# EAGLE board Gain+HPF (EAGLE 7.6.0)
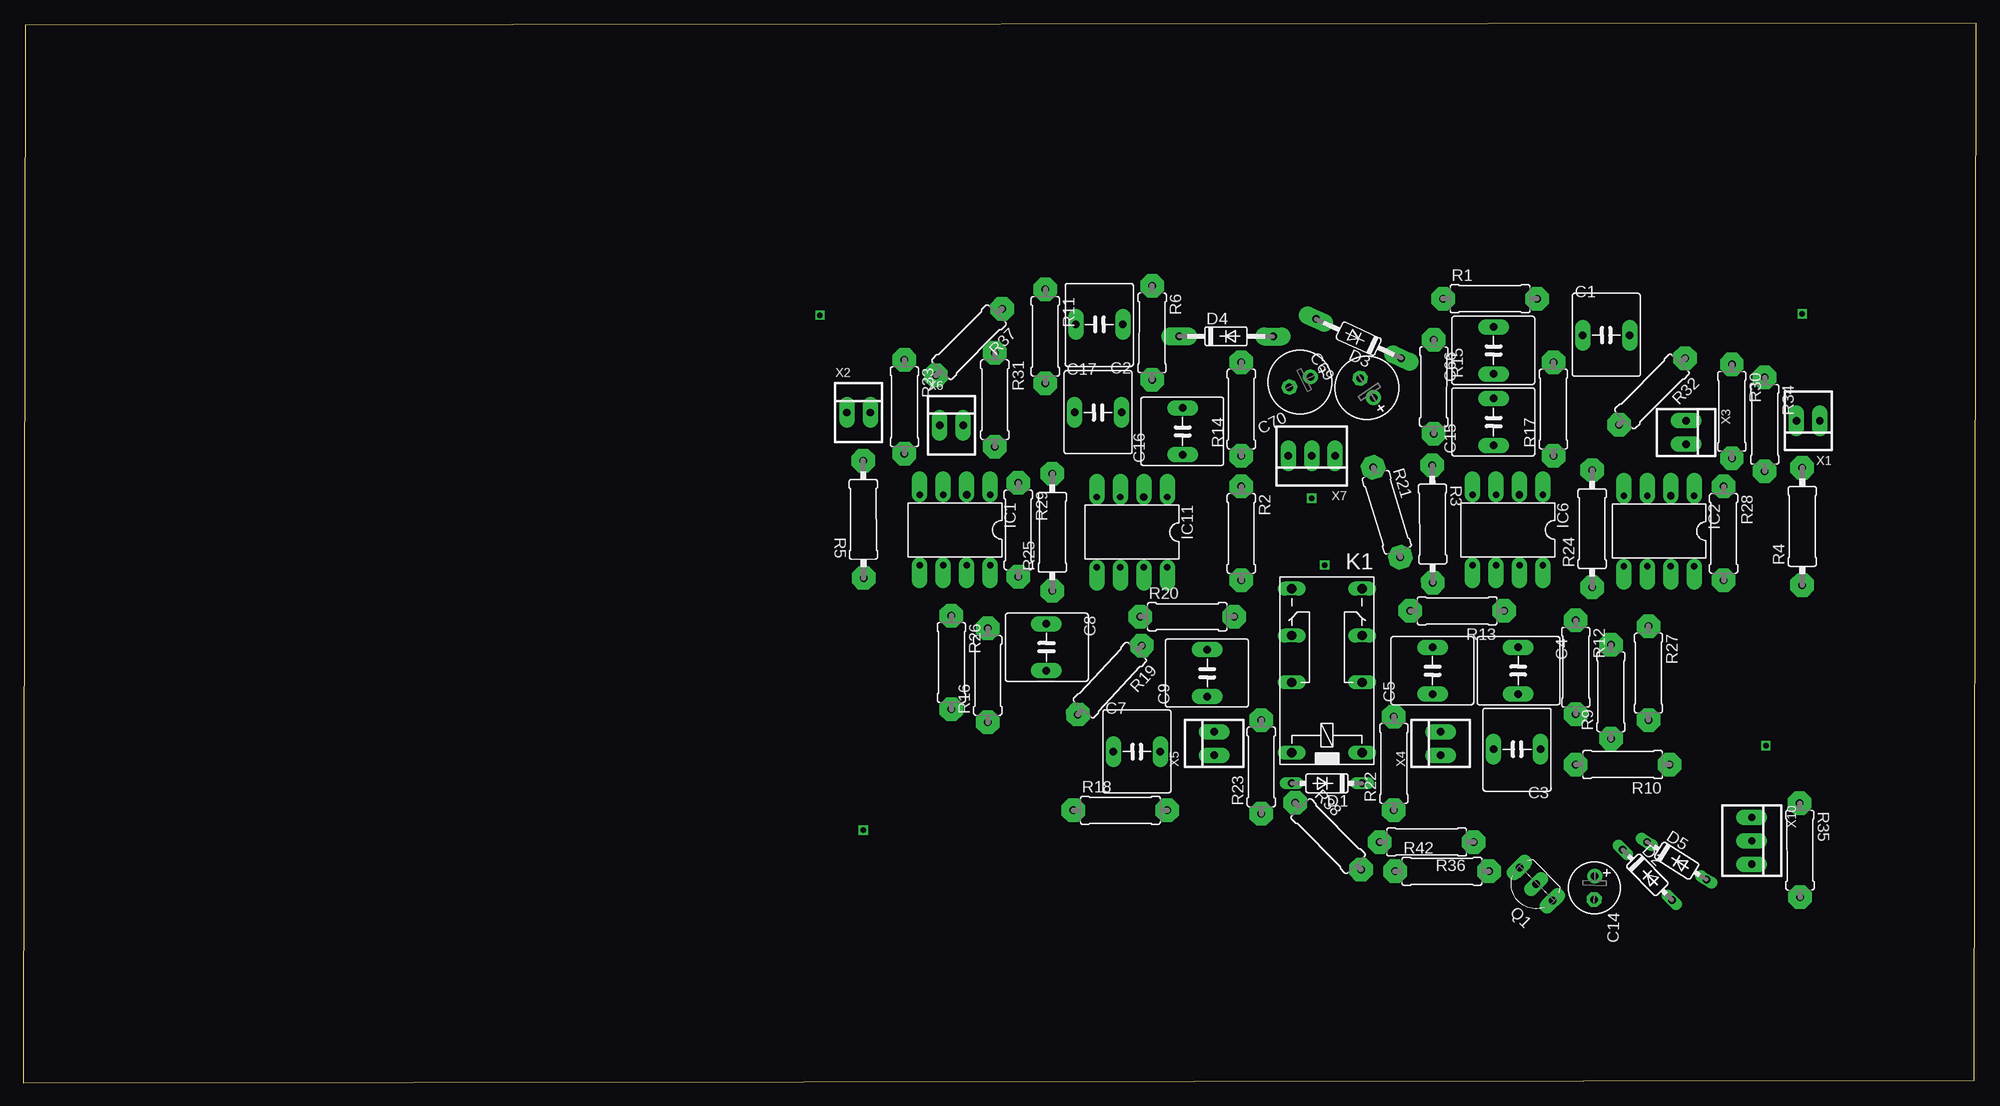
[diagram p0: board, top side]
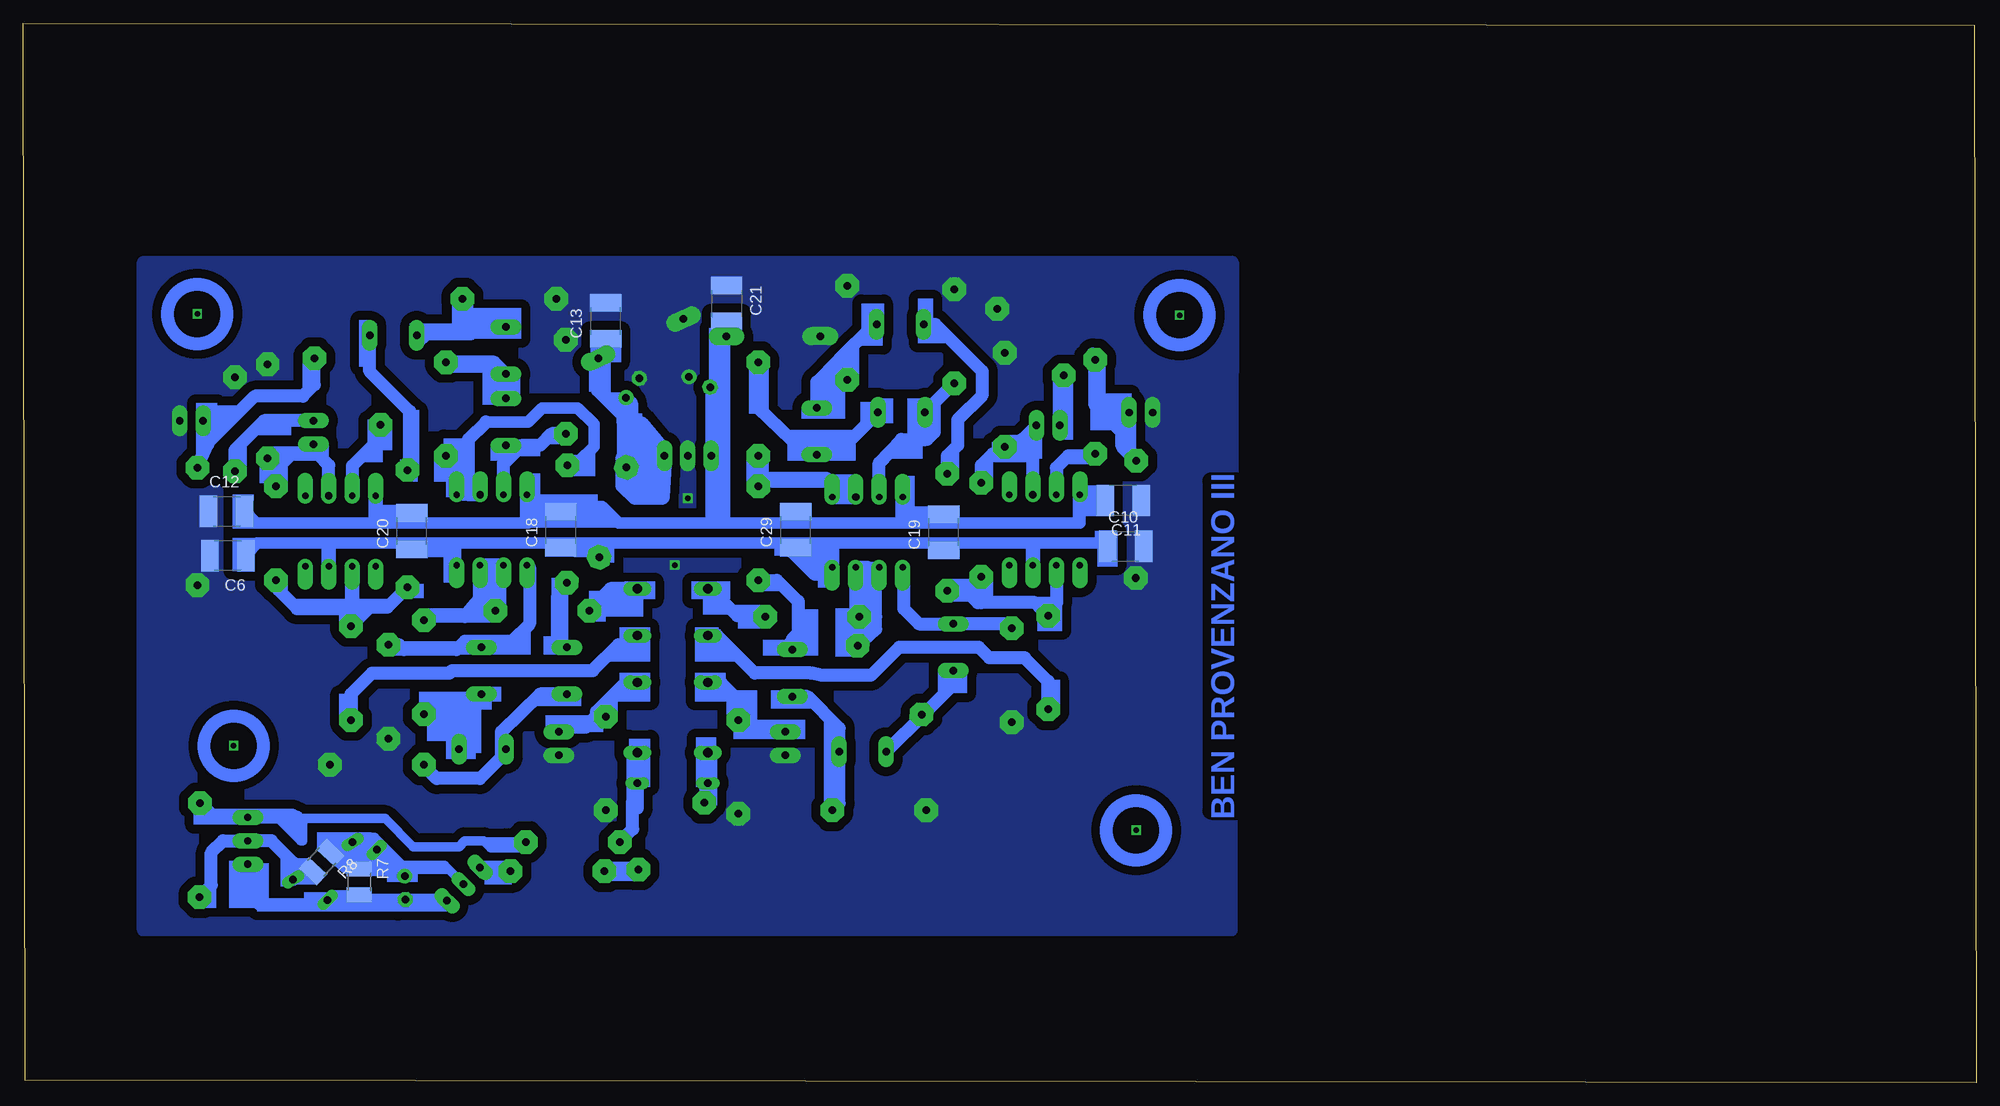
[diagram p1: board, bottom side, seen from below]

Size 211.38 x 114.67 mm. Coordinates in mm from the lower left corner, seen from the top.
Outline: 0,0 211.12,0.25 211.38,114.67 0.25,114.42 0,0
Copper layers (1*16): Top 0.035mm / dielectric 1.5mm / Bottom 0.035mm
Design rules "default": minimum track width 10mil, minimum drill 24mil, track to track 8mil, track to pad 8mil, pad to pad 8mil, via to via 8mil, smd to smd 8mil, copper to edge 40mil, drill to drill 8mil, minimum pad ring 10mil, minimum via ring 8mil, stop-mask expansion 5mil, vias tented up to drill 0mil, thermal gap 10mil

## Footprints (pad centres in the part's own frame; a part is rotated, then mirrored left to right if it is on the bottom)
C050-075X075 = drill 0.813 pad 1.676 long: 1 -2.54,0; 2 2.54,0
C4532 = smd 1.9 x 3.4: 1 -1.95,0; 2 1.95,0
E2,5-6 = drill 0.813 pad 1.6: + -1.27,0 | drill 0.813 pad 1.6 octagon: - 1.27,0
E2,5-7 = drill 0.813 pad 1.6: + -1.27,0 | drill 0.813 pad 1.6 octagon: - 1.27,0
DO35-7 = drill 0.813 long: A 3.81,0; C -3.81,0
DO35-10 = drill 0.813 pad 1.93 long: A 5.08,0; C -5.08,0
DIL08 = drill 0.7 pad 1.676 offset: 1 -3.81,-3.81; 3 1.27,-3.81; 4 3.81,-3.81; 5 3.81,3.81; 6 1.27,3.81; 7 -1.27,3.81; 8 -3.81,3.81 | drill 0.8 pad 1.676 offset: 2 -1.27,-3.81
351 = drill 1.016 long: 1 -3.81,-3.81; 16 -3.81,3.81; O1 8.89,-3.81; O2 8.89,3.81; P1 3.81,-3.81; P2 3.81,3.81; S1 13.97,-3.81; S2 13.97,3.81
TO92-EBC = drill 0.813 pad 1.524 long: B 0,-1.27 | drill 0.813 pad 1.6 long: C -2.54,-1.27; E 2.54,-1.27
0309/10 = drill 0.813 pad 2.54 octagon: 1 -5.08,0; 2 5.08,0
0309/12 = drill 0.813 pad 2.54 octagon: 1 -6.35,0; 2 6.35,0
R1210 = smd 1.6 x 2.7: 1 -1.4,0; 2 1.4,0
22-23-2021 = drill 0.8 pad 1.676 long: 1 -1.27,0; 2 1.27,0
22-23-2031 = drill 0.8 pad 1.676 long: 1 -2.54,0; 2 0,0; 3 2.54,0

## Placement (x,y rotation side)
C1  47nF  [C050-075X075]  171.32,80.9 0 top
C2  47nF  [C050-075X075]  116.46,82.04 180 top
C3  47nF  [C050-075X075]  161.67,36.07 180 top
C4  47nF  [C050-075X075]  161.8,44.58 270 top
C5  47nF  [C050-075X075]  152.53,44.58 90 top
C6  .1  [C4532]  189.23,57.02 180 bottom
C7  47nF  [C050-075X075]  120.52,35.81 0 top
C8  47nF  [C050-075X075]  110.74,47.12 270 top
C9  47nF  [C050-075X075]  128.14,44.32 90 top
C10  .1  [C4532]  92.07,58.04 0 bottom
C11  .1  [C4532]  92.33,62.99 180 bottom
C12  .1  [C4532]  189.36,61.85 0 bottom
C13  .1  [C4532]  148.34,82.42 90 bottom
C14  10uF  [E2,5-6]  170.05,21.08 268.4 top
C15  47nF  [C050-075X075]  159.13,71.5 90 top
C16  47nF  [C050-075X075]  125.48,70.48 90 top
C17  47nF  [C050-075X075]  116.33,72.52 0 top
C18  .1  [C4532]  153.16,59.82 90 bottom
C19  .1  [C4532]  111.76,59.56 90 bottom
C20  .1  [C4532]  169.29,59.69 90 bottom
C21  .1  [C4532]  135.25,84.33 270 bottom
C29  .1  [C4532]  127.76,59.82 90 bottom
C66  47nF  [C050-075X075]  159.13,79.25 90 top
C69  47uF  [E2,5-7]  145.41,75.18 124.4 top
C70  47uF  [E2,5-7]  138.18,75.82 205.9 top
D1  4007  [DO35-7]  141.1,32.39 180 top
D2  9v1  [DO35-7]  175.77,22.48 314.5 top
D3  4007  [DO35-10]  144.53,80.52 155.4 top
D4  4007  [DO35-10]  130.18,80.77 359.9 top
D5  4148  [DO35-7]  178.94,24 327.7 top
IC1  OPA134P  [DIL08]  100.84,59.82 180 top
IC2  OPA134P  [DIL08]  177.04,59.69 180 top
IC6  OPA2134P  [DIL08]  160.66,59.82 180 top
IC11  OPA2134P  [DIL08]  120.01,59.56 180 top
K1  V23105  [351]  141.1,39.5 90 top
Q1  2106A  [TO92-EBC]  162.81,20.57 134.8 top
R1  100k  [0309/10]  158.75,84.84 0 top
R2  0  [0309/10]  131.83,59.44 270 top
R3  0  [0309/12]  152.53,60.45 270.3 top
R4  100k  [0309/12]  192.53,60.2 90 top
R5  100k  [0309/12]  90.93,60.96 90.2 top
R6  100k  [0309/10]  122.17,81.15 269.9 top
R7  8k2  [R1210]  175.01,21.72 269.8 bottom
R8  1k  [R1210]  179.07,23.88 226.8 bottom
R9  220k  [0309/10]  171.83,42.29 90 top
R10  100k  [0309/10]  173.1,34.42 180 top
R11  220k  [0309/10]  110.62,80.77 270 top
R12  47k  [0309/10]  168.02,44.96 270 top
R13  100  [0309/10]  155.19,51.05 180 top
R14  47k  [0309/10]  131.83,72.9 90 top
R15  220k  [0309/10]  152.65,75.31 269.9 top
R16  220k  [0309/10]  104.39,44.07 90 top
R17  47k  [0309/10]  165.61,72.9 90 top
R18  100k  [0309/10]  118.75,29.46 0 top
R19  47k  [0309/10]  117.6,43.56 227.1 top
R20  100  [0309/10]  125.98,50.42 0 top
R21  0  [0309/10]  147.57,61.72 286.8 top
R22  25k  [0309/10]  148.34,34.54 90 top
R23  25k  [0309/10]  133.98,34.16 90 top
R24  100  [0309/12]  169.8,59.94 90 top
R25  100  [0309/12]  111.38,59.56 90 top
R26  100  [0309/10]  100.46,45.47 270 top
R27  100  [0309/10]  175.89,44.32 270 top
R28  10k  [0309/10]  184.02,59.44 270 top
R29  10k  [0309/10]  107.7,59.82 270 top
R30  10k  [0309/10]  184.91,72.64 270 top
R31  10k  [0309/10]  105.16,73.91 270 top
R32  1k1  [0309/10]  176.28,74.8 225.2 top
R33  1k1  [0309/10]  95.38,73.15 270 top
R34  10k  [0309/10]  188.47,71.25 270 top
R35  25k  [0309/10]  192.28,25.15 270.2 top
R36  220  [0309/10]  151.89,26.04 180 top
R37  10k  [0309/10]  102.36,80.14 225.2 top
R38  0  [0309/10]  141.22,26.67 314.6 top
R42  0  [0309/10]  153.54,22.86 0 top
X1  IN  [22-23-2021]  193.17,71.63 180 top
X2  IN  [22-23-2021]  90.42,72.52 0 top
X3  GAIN  [22-23-2021]  179.96,70.36 270 top
X4  OUT  [22-23-2021]  153.42,36.7 90 top
X5  OUT  [22-23-2021]  128.91,36.7 90 top
X6  GAIN  [22-23-2021]  100.46,71.12 0 top
X7  PWR  [22-23-2031]  139.45,67.82 180 top
X10  ENB  [22-23-2031]  187.07,26.16 270 top

## Library data of the parts
C1-C21 C29 C66 C69 C70 R1-R38 R42 = resistor
D1-D5 = diode
IC1 IC2 IC6 IC11 = linear
K1 = relay; OC_FARNELL: unknown; OC_NEWARK: unknown
Q1 = transistor-npn
X1-X6 = con-molex; MF: MOLEX; MPN: 22-23-2021; OC_FARNELL: 1462926; OC_NEWARK: 25C3832
X7 X10 = con-molex; MF: MOLEX; MPN: 22-23-2031; OC_FARNELL: 1462950; OC_NEWARK: 30C0862

## Nets
+15V: C6.1 C10.1 C18.1 C19.1 C20.1 C29.1 IC1.7 IC2.7 IC6.8 IC11.8 R21.2
-15V: C11.2 C12.2 C18.2 C19.2 C20.2 C21.2 C29.2 C70.- D4.A IC1.4 IC2.4 IC6.4 IC11.4 X7.3
GND: C6.2 C10.2 C11.1 C12.1 C13.2 C21.1 C69.- C70.+ D3.A D4.C R1.1 R4.1 R5.1 R6.1 R9.1 R10.1 R11.1 R15.1 R16.1 R18.1 R22.1 R23.1 R30.1 R31.1 R34.1 R37.1 X1.1 X2.1 X4.1 X5.1 X7.2
N$1: IC6.1 IC6.2 R3.1 R17.1
N$2: IC6.6 IC6.7 R12.1 R13.1
N$3: C4.1 IC6.5 R9.2
N$4: C3.1 C4.2 R12.2
N$6: R5.2 R33.1 X2.2
N$7: R4.2 R32.1 X1.2
N$8: C14.- D2.A Q1.C R7.2 X10.3
N$9: C3.2 C5.1 R10.2
N$10: C5.2 R3.2
N$11: IC11.6 IC11.7 R19.1 R20.1
N$12: C15.1 IC6.3 R15.2
N$13: C15.2 C66.1 R17.2
N$14: C8.1 IC11.5 R16.2
N$15: C16.1 C17.2 R14.2
N$16: C17.1 IC11.3 R11.2
N$17: C7.1 C8.2 R19.2
N$18: C7.2 C9.1 R18.2
N$19: IC2.6 R24.1 R27.1 R28.2
N$20: IC1.6 R25.1 R26.1 R29.2
N$21: K1.S1 R13.2
N$22: K1.S2 R20.2
N$23: C13.1 C69.+ D3.C R21.1 X7.1
N$24: K1.O1 R27.2
N$25: K1.O2 R26.2
N$26: C1.2 R24.2
N$27: C9.2 R2.2
N$28: IC11.1 IC11.2 R2.1 R14.1
N$29: C2.2 R25.2
N$30: IC2.3 R32.2
N$31: IC2.2 R28.1 R30.2 X3.2
N$32: K1.P2 R23.2 X5.2
N$33: K1.P1 R22.2 X4.2
N$34: IC1.3 R33.2
N$35: IC1.2 R29.1 R31.2 X6.2
N$36: R34.2 X3.1
N$37: R37.2 X6.1
N$38: C14.+ D2.C D5.C Q1.B R7.1 R8.1
N$39: D1.A K1.16 R38.1
N$40: D1.C K1.1 R36.2
N$44: R35.1 R36.1 X10.1
N$47: D5.A R8.2 R35.2 X10.2
N$49: Q1.E R42.2
N$50: R38.2 R42.1
N$76: C1.1 C66.2 R1.2
N$102: C2.1 C16.2 R6.2

## Tracks (layer width: path | path; a pad name or v marks a point on that pad's centre or on a via)
+15V
  Bottom 0.813: C29.1 127.76,58.42
  Bottom 1.27: 123.7,58.42 127.76,58.42 148.46,58.42 | 148.46,58.42 164.59,58.42 | 164.59,58.42 169.29,58.42 | 169.29,58.42 178.31,58.42 | 123.82,58.29 123.7,58.42 | IC6.8 164.59,56.13 164.59,58.42 | 123.7,58.42 112.65,58.42 | 112.65,58.42 102.11,58.42 | 148.46,58.42 148.46,57.6 R21.2 149.44,56.86 150.24,57.66 152.95,57.66 C18.1 | 102.11,58.42 IC1.7 | IC2.7 178.31,58.42 | C20.1 169.29,58.42 | 178.31,58.42 186.05,58.42 186.69,57.66 C6.1 187.07,57.49 187.07,57.4 186.94,57.28 186.94,56.64 | C19.1 111.63,58.38 112.65,58.42 | C10.1 94.28,58.42 102.11,58.42
  Bottom 1.422: IC11.8 123.82,55.5 124.33,54.99 125.73,54.99 128.14,57.4 128.14,57.49 C29.1
-15V
  Bottom 0.406: D4.A | D4.A C21.2
  Bottom 0.813: C29.2 127.97,61.72 127.89,61.72 127.89,60.58
  Bottom 1.27: 112.78,60.58 97.03,60.58 97.03,62.99 | 112.78,60.58 116.08,60.58 | 116.08,60.58 127.89,60.58 136.91,60.58 | 169.42,60.58 156.72,60.58 156.72,62.1 | 169.42,60.58 173.23,60.58 | 173.23,60.58 186.18,60.58 C12.2 | 116.21,60.71 116.08,60.58 | IC6.4 156.72,63.5 156.72,62.1 | X7.3 136.91,60.58 | 156.08,61.47 156.72,62.1 | IC1.4 97.03,62.99 | IC2.4 173.23,60.58 | C20.2 169.42,61.51 169.42,60.58 | C19.2 111.38,60.62 112.78,60.58 | C11.2 97.03,62.99 | 136.91,60.58 146.94,60.58 148.72,62.36 152.15,62.36 153.03,61.47 153.67,61.47
  Bottom 1.422: IC11.4 116.21,60.71 | C18.2 153.46,61.47 153.67,61.47 156.08,61.47 | 135.89,67.57 X7.3 136.91,67.69 135.64,68.96 135.64,71.5 136.02,72.01 136.02,74.25 C70.- 136.57,75.26 136.02,75.82 136.02,80.13 D4.A
  Bottom 1.676: 128.52,61.21 128.02,61.72 C29.2
GND  (via drill 0.6)
  other vias: 140.84,56.01 139.45,63.25
  pour Bottom (isolate 0.965, no thermals): 80.52,88.77 80.64,16.51 198.37,16.51 198.37,88.77
N$1
  Bottom 1.27: R3.1 151.99,67.31 151.13,67.31 149.61,68.83 149.61,71.25 151.38,73.03 155.19,73.03 156.72,71.5 161.29,71.5
  Bottom 1.422: 161.29,71.5 163.19,69.6 163.19,67.82 | 163.19,67.82 163.19,63.63 IC6.2 IC6.1 | R17.1 163.19,67.82
N$2
  Bottom 1.422: IC6.6 160.78,56.01 | 160.78,56.01 IC6.7 | R13.1 160.78,51.56 160.78,53.72 | 160.78,53.72 160.78,56.01 | 160.78,53.72 163.58,50.42 167.39,50.42 167.77,50.04 R12.1
N$3
  Bottom 1.422: IC6.5 156.59,55.75 156.59,49.66 158.5,47.75 161.67,47.75 | 161.67,47.75 163.58,47.75 164.47,46.86 170.18,46.86 170.69,47.37 R9.2 | C4.1 161.67,47.24 161.67,47.75
N$4
  Bottom 1.422: C4.2 164.08,39.75 | 164.08,39.75 R12.2 | C3.1 164.08,37.08 164.08,39.75
N$5  (via drill 0.6)
  other vias: 86.23,83.06
N$6
  Bottom 1.422: R5.2 92.46,68.86 92.46,70.36 94.81,72.71 | R33.1 95.63,78.87 95.38,78.61 95.38,73.28 94.81,72.71 | X2.2 92.39,73.22 94.81,72.71
N$7
  Bottom 1.422: R4.2 191.39,69.09 191.39,69.22 | 191.39,69.22 191.39,71.12 X1.2 | R32.1 179.86,75.54 181.1,74.3 186.31,74.3 191.39,69.22
N$8
  Bottom 1.016: Q1.C 165.74,19.43 170.81,19.43 | 170.81,19.43 174.88,19.43 | 174.88,19.43 177.93,19.3 177.93,19.38 D2.A 177.88,19.43 175.64,19.43 | C14.- 170.81,19.02 170.81,19.43 | R7.2 175.51,20.63 174.88,19.99 174.88,19.43
  Bottom 1.422: X10.3 187.07,20.57 185.8,19.3 177.93,19.3
N$9
  Bottom 1.422: C5.1 155.45,42.04 159.64,37.97 159.64,36.07 | C3.2 159.64,36.07 | 159.64,36.07 159.64,35.18 161.92,32.89 166.62,32.89 168.02,34.29 R10.2
N$10
  Bottom 1.422: C5.2 153.54,48.26 153.54,52.58 152.55,53.57 R3.2
N$11
  Bottom 1.27: IC11.6 120.01,55.75
  Bottom 1.422: 119.13,50.42 119.13,54.86 120.01,55.75 IC11.7 | R20.1 119.13,50.42 | R19.1 119.13,49.09 119.13,50.42
N$12
  Bottom 1.422: IC6.3 159.38,66.93 | 159.38,66.93 159.38,67.06 159.13,67.31 C15.1 | R15.2 | R15.2 154.18,70.23 155.45,68.96 157.35,68.96 159.38,66.93
N$13
  Bottom 1.422: R17.2 160.4,77.98 C66.1 C15.2
N$14
  Bottom 1.422: IC11.5 116.08,55.63 116.08,51.31 114.43,49.66 111.25,49.66 C8.1 104.9,49.66 R16.2
N$15
  Bottom 1.422: C17.2 121.79,69.6 125.48,69.6 | 125.48,69.6 C16.1 | R14.2 131.83,73.03 128.27,69.6 125.48,69.6
N$16
  Bottom 1.422: IC11.3 118.75,67.06 116.33,69.6 114.43,69.6 113.66,69.6 | C17.1 113.66,72.39 113.66,69.6 | R11.2 112.78,73.53 112.78,70.36 113.54,69.6 113.66,69.6
N$17
  Bottom 1.422: C8.2 110.74,43.05 113.86,39.94 | 113.86,39.94 C7.1 | R19.2 113.87,39.94 113.86,39.94
N$18
  Bottom 1.422: C9.1 126.49,41.78 123.06,38.35 123.06,36.32 C7.2 123.06,30.23 R18.2
N$19
  Bottom 1.422: R24.1 171.96,51.44 173.86,51.44 | 173.86,51.44 175.13,51.44 175.32,51.63 | 175.32,51.63 175.77,52.07 IC2.6 | R27.1 173.86,51.44 | R28.2 183.77,54.1 183.77,53.34 181.74,51.31 175.64,51.31 175.32,51.63
N$20
  Bottom 1.422: R26.1 101.35,51.44 | 107.7,51.94 101.85,51.94 101.47,51.56 101.35,51.44 | 107.7,51.94 108.08,51.94 109.47,53.34 R25.1 | IC1.6 99.57,51.82 101.35,51.44 | R29.2 107.7,51.94
N$21
  Bottom 1.422: K1.S1 147.83,53.47 150.11,51.18 R13.2
N$22
  Bottom 1.422: R20.2 131.19,50.55 134.11,50.55 136.91,53.34 K1.S2
N$23
  Bottom 0.406: D3.C 148.34,78.4 C13.1
  Bottom 1.422: 146.3,71.25 146.43,71.37 146.43,72.14 149.24,74.94 D3.C | C69.+ 145.54,73.55 145.54,71.25
  Bottom 1.676: 142.37,63.37 145.16,63.37 146.43,64.64 146.43,66.93 146.3,67.82 146.3,71.25 145.54,71.25 144.53,71.25 142.37,68.71 X7.1 142.24,63.37 142.37,63.37 | 142.37,63.37 145.19,66.44 R21.1 146.43,67.55
N$24
  Bottom 1.422: K1.O1 144.91,47.88 144.4,47.37 146.94,47.37 149.73,44.58 164.97,44.58 165.23,44.32 173.61,44.32 175.89,42.04 R27.2
N$25
  Bottom 1.422: K1.O2 136.27,48.39 132.21,44.32 126.11,44.32 124.97,44.07 119.63,44.07 116.59,47.12 107.95,47.12 106.81,45.97 103,45.97 100.46,43.43 R26.2
N$26
  Bottom 1.422: R24.2 169.54,66.55 169.54,72.64 173.86,76.96 C1.2
N$27
  Bottom 1.422: R2.2 129.79,54.36 127.51,52.07 127.51,48.64 128.14,48.01 C9.2
N$28
  Bottom 1.422: IC11.2 121.28,64.64 121.41,64.77 123.57,64.77 | 123.57,64.77 123.82,64.52 IC11.1 | 131.83,66.04 R14.1 | R2.1 131.83,66.04 | 131.83,66.04 131.19,65.41 124.46,65.41 123.7,64.77 123.57,64.77
N$29
  Bottom 1.27: 113.92,82.8 C2.2
  Bottom 1.422: R25.2 111.38,67.82 110.24,68.96 110.24,71.75 107.57,74.42 107.57,76.96 112.65,82.04 C2.2
N$30
  Bottom 1.422: IC2.3 175.77,66.73 172.7,69.8 R32.2
N$31
  Bottom 1.422: IC2.2 178.31,66.8 179.45,67.94 | 179.45,67.94 182.37,67.94 | 182.37,67.94 184.02,66.29 R28.1 | R30.2 184.53,67.94 182.37,67.94 | X3.2 179.45,68.58 179.45,67.94
N$32
  Bottom 1.422: K1.P2 135.89,43.31 132.72,40.13 132.72,38.86 133.1,39.24 R23.2 132.72,37.97 X5.2
N$33
  Bottom 1.422: X4.2 152.91,38.48 150.5,38.48 149.81,39.19 149.81,39.21 149.51,39.51 149.35,39.51 | R22.2 148.6,39.51 149.35,39.51 | K1.P1 146.18,43.31 149.35,40.13 149.35,39.51
N$34
  Bottom 1.422: IC1.3 99.57,66.55 98.3,67.82 95.5,67.82 R33.2
N$35
  Bottom 1.422: IC1.2 102.11,67.56 102.62,68.07 103.25,68.07 | 103.25,68.07 104.65,68.07 | 104.65,68.07 106.43,68.07 107.7,66.8 R29.1 | R31.2 104.65,68.83 104.65,68.07 | X6.2 103.25,69.6 103.25,68.07
N$36
  Bottom 1.422: X3.1 185.29,71.63 188.47,68.45 R34.2
N$37
  Bottom 1.422: R37.2 99.19,75.62 X6.1
N$38
  Bottom 1.016: Q1.B 165.74,23.5 170.31,23.5 | 170.31,23.5 171.84,23.5 | 171.84,23.5 172.85,23.5 173,23.34 173.23,23.34 | C14.+ 170.09,22.7 D2.C 172.41,25.02 173.36,25.02 171.84,23.5 | 173.23,23.34 174.78,23.34 R7.1 176.53,23.12 177.16,23.75 177.16,24.26 176.91,24.26 176.91,24.5 | 174.62,26.54 173.35,26.54 170.31,23.5 | 173.23,24 173.23,23.34
  Bottom 1.422: 177.16,24.26 178.57,25.66 R8.1 | D5.C 173.94,24 173.23,24
N$39
  Bottom 1.422: K1.16 D1.A 137.29,29.84 137.66,30.21 R38.1
N$40
  Bottom 1.422: K1.1 D1.C 144.91,30.48 | 144.91,29.72 144.91,30.48 | R36.2 145.41,27.43 145.41,30.48 144.91,30.48
N$41  (via drill 0.6)
  other vias: 192.53,83.19
N$42  (via drill 0.6)
  other vias: 90.93,27.3
N$43  (via drill 0.6)
  other vias: 188.59,36.45
N$44
  Bottom 1.016: R36.1 157.61,25.4 160.78,25.4 161.54,26.16 163.58,26.16 164.21,25.53 169.16,25.53 172.21,28.57 180.97,28.57 181.1,28.45 181.1,26.16 181.36,26.16 183.9,28.7 X10.1
  Bottom 1.422: R35.1 190.99,28.96 182.25,28.96 181.86,28.57 181.61,28.57 181.74,28.7 X10.1
N$47
  Bottom 1.422: R8.2 180.15,22.73 181.99,22.73 | 181.99,22.73 182.25,22.73 182.25,23.88 184.53,26.16 X10.2 189.74,26.16 191.01,24.89 191.01,21.35 R35.2 | D5.A 181.99,22.14 181.99,22.73
N$49
  Bottom 1.422: R42.2 159.03,23.27 Q1.E
N$50
  Bottom 1.422: R38.2 144.98,22.86 R42.1
N$76
  Bottom 1.422: C66.2 159.26,81.92 159.26,82.68 161.29,82.68 162.94,81.03 163.96,81.03 | 163.96,81.03 167.77,81.03 168.78,80.01 C1.1 | R1.2 163.83,81.15 163.96,81.03
N$102
  Bottom 1.422: C16.2 125.48,75.82 123.06,78.23 | 123.06,78.23 119.25,82.04 C2.1 | 123.06,78.23 122.68,78.23 122.01,77.56 R6.2
(copper drawn outside any net)
  shapes: Bottom area x350, Bottom circle x4

## Text on the board
Bottom: BEN PROVENZANO III